# EAGLE board Qwiic_BMP388_Pressure_Sensor-Panel (EAGLE 9.5.2), part 1 of 3
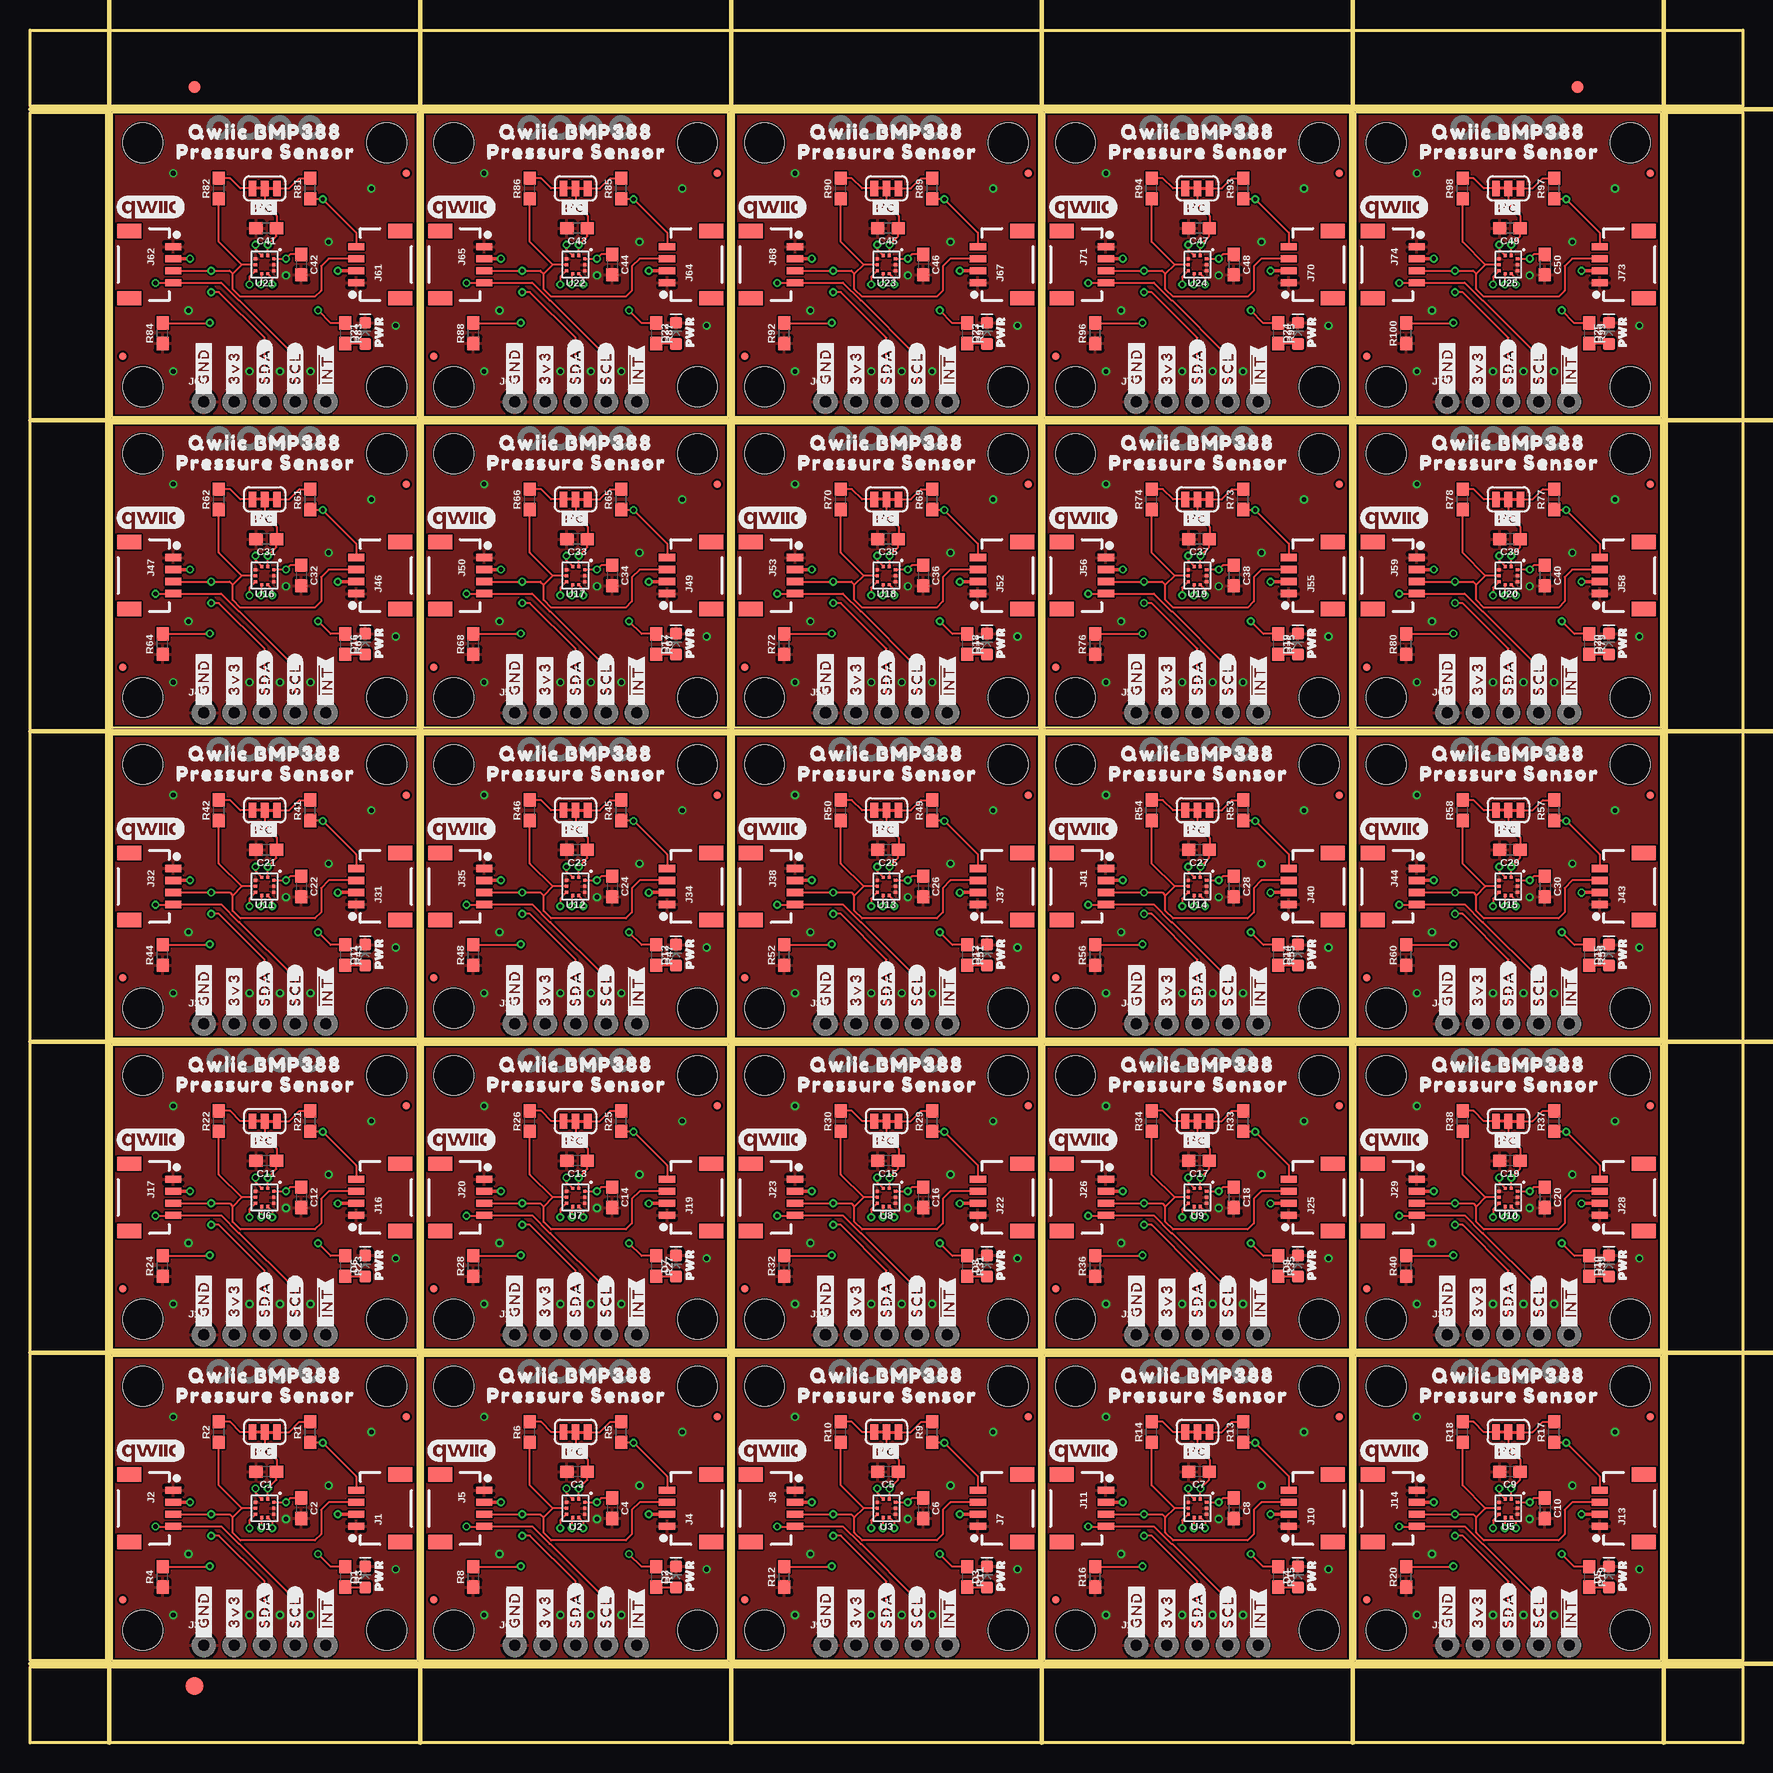
[diagram p0: board, top side]
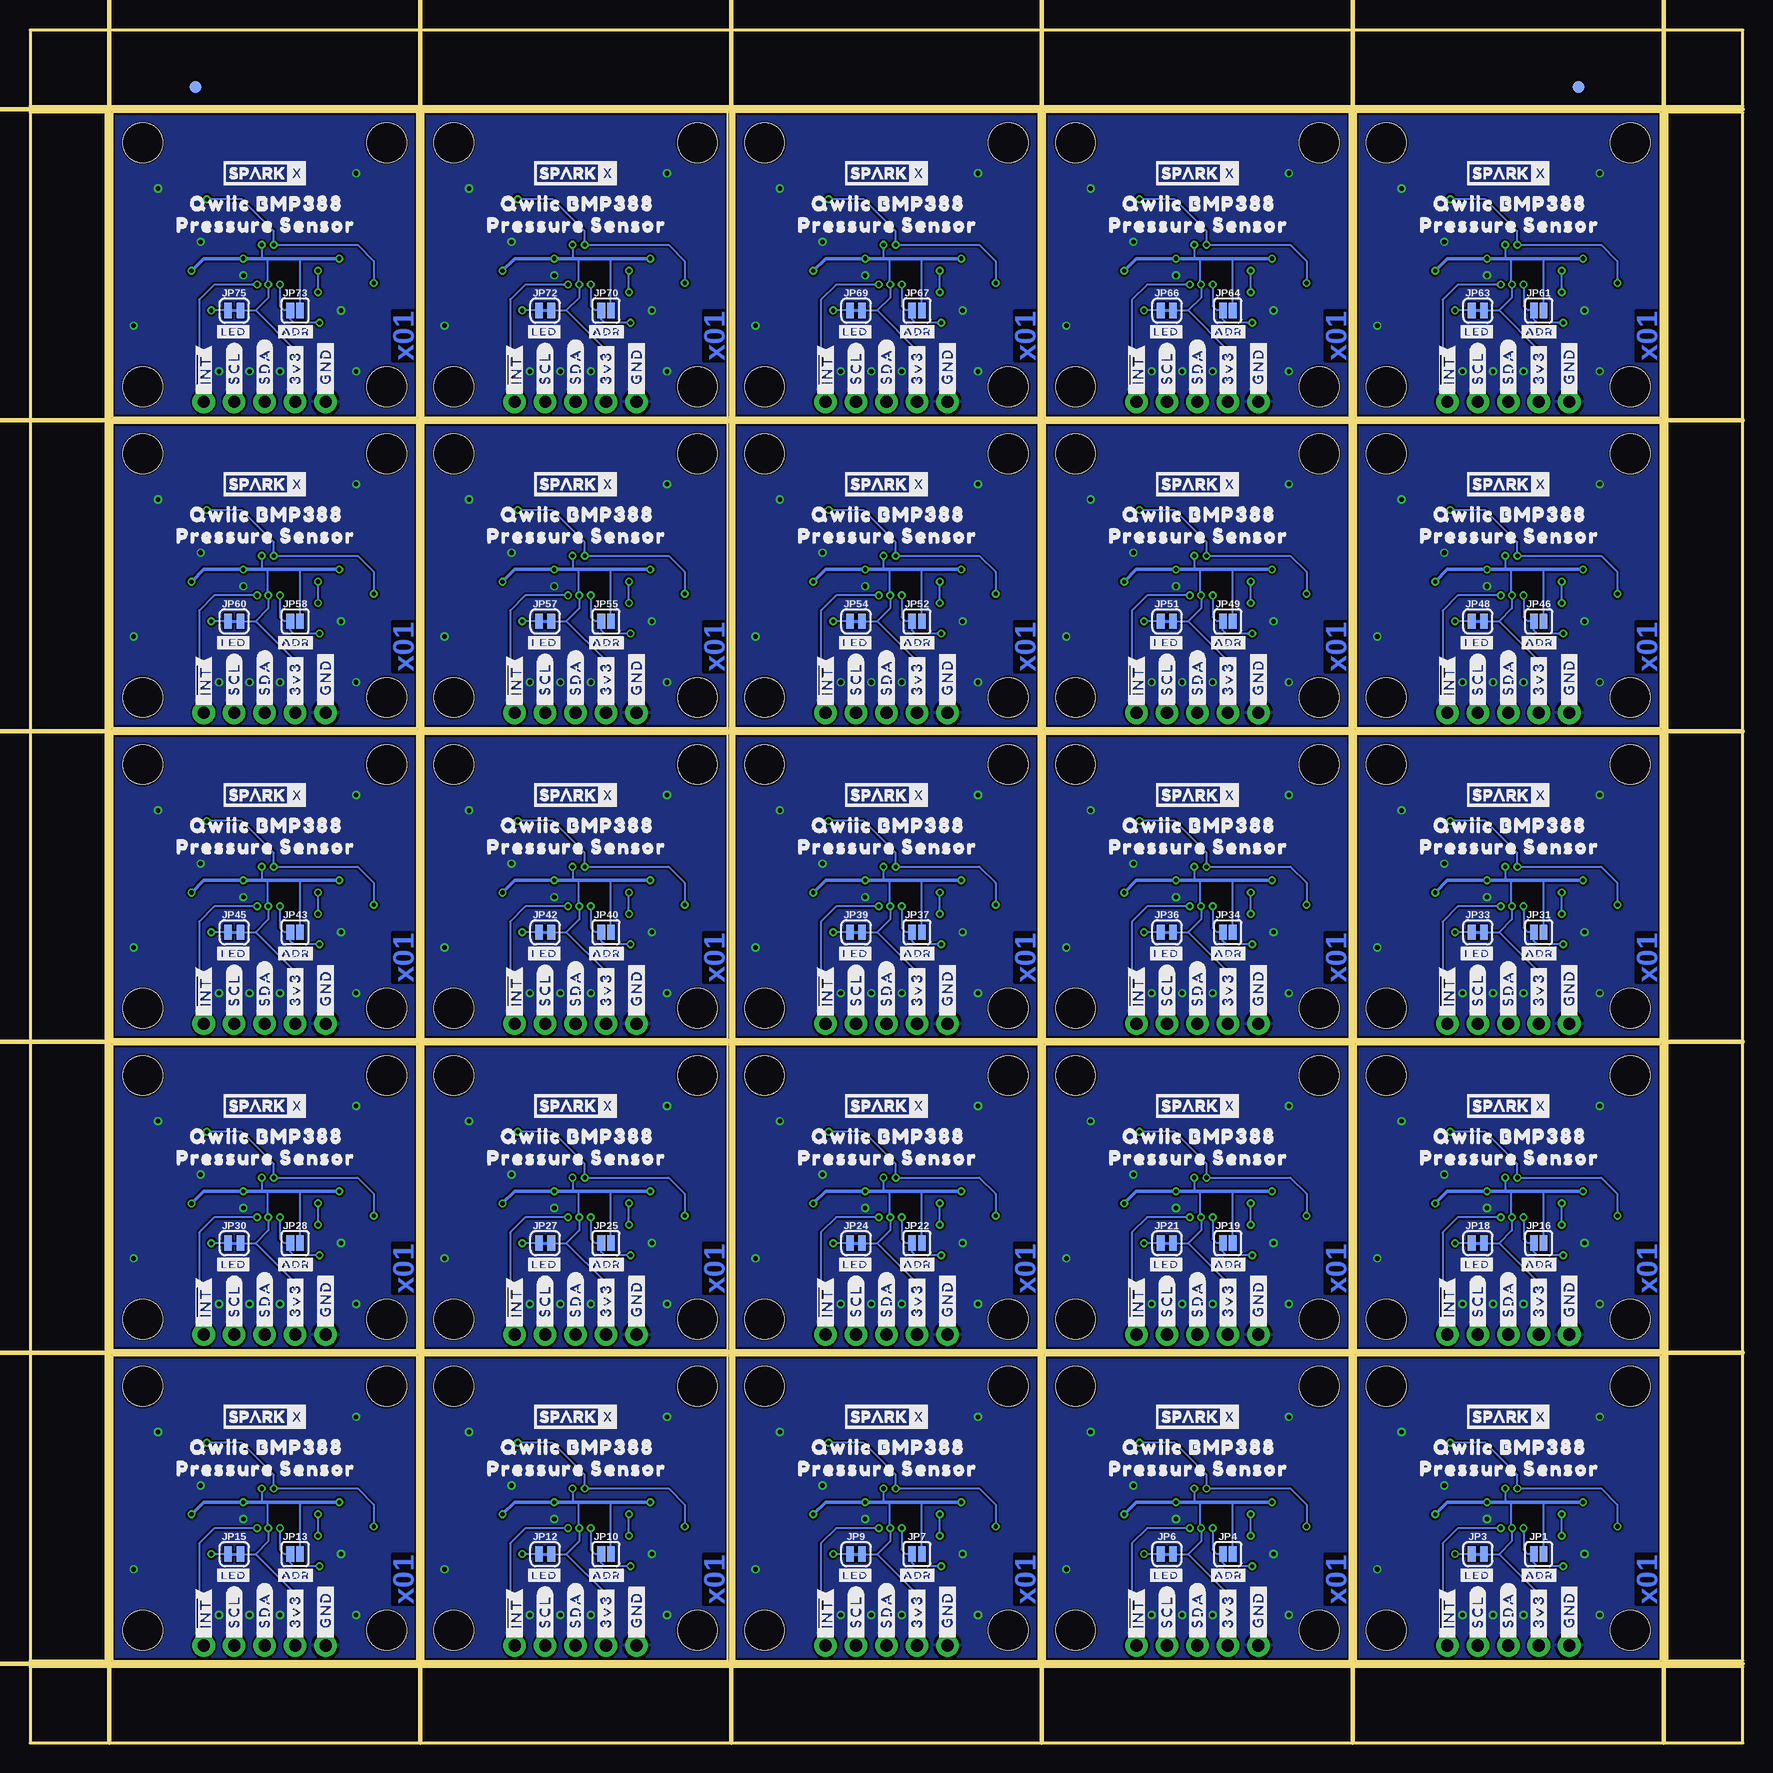
[diagram p1: board, bottom side, seen from below]

Size 142.75 x 142.75 mm. Coordinates in mm from the lower left corner, seen from the top.
Outline: 6.86,32.26 32.26,32.26 32.26,6.86 6.86,6.86 6.86,32.26
Outline: 32.77,32.26 58.17,32.26 58.17,6.86 32.77,6.86 32.77,32.26
Outline: 58.67,32.26 84.07,32.26 84.07,6.86 58.67,6.86 58.67,32.26
Outline: 84.58,32.26 109.98,32.26 109.98,6.86 84.58,6.86 84.58,32.26
Outline: 110.49,32.26 135.89,32.26 135.89,6.86 110.49,6.86 110.49,32.26
Outline: 6.86,58.17 32.26,58.17 32.26,32.77 6.86,32.77 6.86,58.17
Outline: 32.77,58.17 58.17,58.17 58.17,32.77 32.77,32.77 32.77,58.17
Outline: 58.67,58.17 84.07,58.17 84.07,32.77 58.67,32.77 58.67,58.17
Outline: 84.58,58.17 109.98,58.17 109.98,32.77 84.58,32.77 84.58,58.17
Outline: 110.49,58.17 135.89,58.17 135.89,32.77 110.49,32.77 110.49,58.17
Outline: 6.86,84.07 32.26,84.07 32.26,58.67 6.86,58.67 6.86,84.07
Outline: 32.77,84.07 58.17,84.07 58.17,58.67 32.77,58.67 32.77,84.07
Outline: 58.67,84.07 84.07,84.07 84.07,58.67 58.67,58.67 58.67,84.07
Outline: 84.58,84.07 109.98,84.07 109.98,58.67 84.58,58.67 84.58,84.07
Outline: 110.49,84.07 135.89,84.07 135.89,58.67 110.49,58.67 110.49,84.07
Outline: 6.86,109.98 32.26,109.98 32.26,84.58 6.86,84.58 6.86,109.98
Outline: 32.77,109.98 58.17,109.98 58.17,84.58 32.77,84.58 32.77,109.98
Outline: 58.67,109.98 84.07,109.98 84.07,84.58 58.67,84.58 58.67,109.98
Outline: 84.58,109.98 109.98,109.98 109.98,84.58 84.58,84.58 84.58,109.98
Outline: 110.49,109.98 135.89,109.98 135.89,84.58 110.49,84.58 110.49,109.98
Outline: 6.86,135.89 32.26,135.89 32.26,110.49 6.86,110.49 6.86,135.89
Outline: 32.77,135.89 58.17,135.89 58.17,110.49 32.77,110.49 32.77,135.89
Outline: 58.67,135.89 84.07,135.89 84.07,110.49 58.67,110.49 58.67,135.89
Outline: 84.58,135.89 109.98,135.89 109.98,110.49 84.58,110.49 84.58,135.89
Outline: 110.49,135.89 135.89,135.89 135.89,110.49 110.49,110.49 110.49,135.89
Outline: 0,6.35 142.75,6.35 142.75,0 0,0 0,6.35
Outline: 136.4,135.89 142.75,135.89 142.75,6.86 136.4,6.86 136.4,135.89
Outline: 0,142.75 142.75,142.75 142.75,136.4 0,136.4 0,142.75
Outline: 0,135.89 6.35,135.89 6.35,6.86 0,6.86 0,135.89
Copper layers (1*16): Top 0.035mm / dielectric 1.5mm / Bottom 0.035mm
Design rules "Qwiic_BMP388_Pressure_Sensor": minimum track width 6mil, minimum drill 0.3mm, track to track 6mil, track to pad 6mil, pad to pad 6mil, via to via 6mil, smd to smd 6mil, copper to edge 6mil, drill to drill 6mil, minimum pad ring 6mil, minimum via ring 6mil, stop-mask expansion 4mil, vias tented up to drill 25mil, thermal gap 10mil
Milling: 12 lines

## Footprints (pad centres in the part's own frame; a part is rotated, then mirrored left to right if it is on the bottom)
QWIIC_BOARD_MOUNT_HOLES = hole 3.302: -10.16,10.16; 10.16,10.16; 10.16,-10.16; -10.16,-10.16
0603 = smd 1.1 x 1: 1 -0.85,0; 2 0.85,0
LED-0603 = smd 1 x 1: A -0.877,0; C 0.877,0
FIDUCIAL-1X2 = smd 1 x 1: 1 0,0
FIDUCIAL-1.5X3 = smd 1.5 x 1.5: 1 0,0
FIDUCIAL-MICRO = smd 0.635 x 0.635: 1 0,0
1X04_1MM_RA = smd 0.6 x 1.35: 1 -1.5,0; 2 -0.5,0; 3 0.5,0; 4 1.5,0 | smd 1.2 x 2: NC1 2.8,-3.675; NC2 -2.8,-3.675
1X05_NO_SILK = drill 1.016 pad 1.88: 1 0,0; 2 2.54,0; 3 5.08,0; 4 7.62,0; 5 10.16,0
SMT-JUMPER_2_NO_SILK = smd 0.635 x 1.27: 1 -0.406,0; 2 0.406,0
SMT-JUMPER_3_2-NC_TRACE_SILK = smd 0.635 x 1.27: 1 -1.016,0; 2 0,0; 3 1.016,0
SMT-JUMPER_2_NC_TRACE_SILK = smd 0.635 x 1.27: 1 -0.508,0; 2 0.508,0
LGA-10(2X2) = smd 0.25 x 0.275: 1 0.25,0.762; 2 -0.25,0.762; 6 -0.25,-0.762; 7 0.25,-0.762 | smd 0.275 x 0.25: 3 -0.762,0.5; 4 -0.762,0; 5 -0.762,-0.5; 8 0.762,-0.5; 9 0.762,0; 10 0.762,0.5

## Placement (x,y rotation side)
A1  QWIIC_BOARD_OUTLINEH  [QWIIC_BOARD_MOUNT_HOLES]  19.56,19.56 180 top
A2  QWIIC_BOARD_OUTLINEH  [QWIIC_BOARD_MOUNT_HOLES]  45.47,19.56 180 top
A3  QWIIC_BOARD_OUTLINEH  [QWIIC_BOARD_MOUNT_HOLES]  71.37,19.56 180 top
A4  QWIIC_BOARD_OUTLINEH  [QWIIC_BOARD_MOUNT_HOLES]  97.28,19.56 180 top
A5  QWIIC_BOARD_OUTLINEH  [QWIIC_BOARD_MOUNT_HOLES]  123.19,19.56 180 top
A6  QWIIC_BOARD_OUTLINEH  [QWIIC_BOARD_MOUNT_HOLES]  19.56,45.47 180 top
A7  QWIIC_BOARD_OUTLINEH  [QWIIC_BOARD_MOUNT_HOLES]  45.47,45.47 180 top
A8  QWIIC_BOARD_OUTLINEH  [QWIIC_BOARD_MOUNT_HOLES]  71.37,45.47 180 top
A9  QWIIC_BOARD_OUTLINEH  [QWIIC_BOARD_MOUNT_HOLES]  97.28,45.47 180 top
A10  QWIIC_BOARD_OUTLINEH  [QWIIC_BOARD_MOUNT_HOLES]  123.19,45.47 180 top
A11  QWIIC_BOARD_OUTLINEH  [QWIIC_BOARD_MOUNT_HOLES]  19.56,71.37 180 top
A12  QWIIC_BOARD_OUTLINEH  [QWIIC_BOARD_MOUNT_HOLES]  45.47,71.37 180 top
A13  QWIIC_BOARD_OUTLINEH  [QWIIC_BOARD_MOUNT_HOLES]  71.37,71.37 180 top
A14  QWIIC_BOARD_OUTLINEH  [QWIIC_BOARD_MOUNT_HOLES]  97.28,71.37 180 top
A15  QWIIC_BOARD_OUTLINEH  [QWIIC_BOARD_MOUNT_HOLES]  123.19,71.37 180 top
A16  QWIIC_BOARD_OUTLINEH  [QWIIC_BOARD_MOUNT_HOLES]  19.56,97.28 180 top
A17  QWIIC_BOARD_OUTLINEH  [QWIIC_BOARD_MOUNT_HOLES]  45.47,97.28 180 top
A18  QWIIC_BOARD_OUTLINEH  [QWIIC_BOARD_MOUNT_HOLES]  71.37,97.28 180 top
A19  QWIIC_BOARD_OUTLINEH  [QWIIC_BOARD_MOUNT_HOLES]  97.28,97.28 180 top
A20  QWIIC_BOARD_OUTLINEH  [QWIIC_BOARD_MOUNT_HOLES]  123.19,97.28 180 top
A21  QWIIC_BOARD_OUTLINEH  [QWIIC_BOARD_MOUNT_HOLES]  19.56,123.19 180 top
A22  QWIIC_BOARD_OUTLINEH  [QWIIC_BOARD_MOUNT_HOLES]  45.47,123.19 180 top
A23  QWIIC_BOARD_OUTLINEH  [QWIIC_BOARD_MOUNT_HOLES]  71.37,123.19 180 top
A24  QWIIC_BOARD_OUTLINEH  [QWIIC_BOARD_MOUNT_HOLES]  97.28,123.19 180 top
A25  QWIIC_BOARD_OUTLINEH  [QWIIC_BOARD_MOUNT_HOLES]  123.19,123.19 180 top
C1  0.1uF  [0603]  19.68,22.61 180 top
C2  0.1uF  [0603]  22.61,19.56 270 top
C3  0.1uF  [0603]  45.59,22.61 180 top
C4  0.1uF  [0603]  48.51,19.56 270 top
C5  0.1uF  [0603]  71.5,22.61 180 top
C6  0.1uF  [0603]  74.42,19.56 270 top
C7  0.1uF  [0603]  97.41,22.61 180 top
C8  0.1uF  [0603]  100.33,19.56 270 top
C9  0.1uF  [0603]  123.32,22.61 180 top
C10  0.1uF  [0603]  126.24,19.56 270 top
C11  0.1uF  [0603]  19.68,48.51 180 top
C12  0.1uF  [0603]  22.61,45.47 270 top
C13  0.1uF  [0603]  45.59,48.51 180 top
C14  0.1uF  [0603]  48.51,45.47 270 top
C15  0.1uF  [0603]  71.5,48.51 180 top
C16  0.1uF  [0603]  74.42,45.47 270 top
C17  0.1uF  [0603]  97.41,48.51 180 top
C18  0.1uF  [0603]  100.33,45.47 270 top
C19  0.1uF  [0603]  123.32,48.51 180 top
C20  0.1uF  [0603]  126.24,45.47 270 top
C21  0.1uF  [0603]  19.68,74.42 180 top
C22  0.1uF  [0603]  22.61,71.37 270 top
C23  0.1uF  [0603]  45.59,74.42 180 top
C24  0.1uF  [0603]  48.51,71.37 270 top
C25  0.1uF  [0603]  71.5,74.42 180 top
C26  0.1uF  [0603]  74.42,71.37 270 top
C27  0.1uF  [0603]  97.41,74.42 180 top
C28  0.1uF  [0603]  100.33,71.37 270 top
C29  0.1uF  [0603]  123.32,74.42 180 top
C30  0.1uF  [0603]  126.24,71.37 270 top
C31  0.1uF  [0603]  19.68,100.33 180 top
C32  0.1uF  [0603]  22.61,97.28 270 top
C33  0.1uF  [0603]  45.59,100.33 180 top
C34  0.1uF  [0603]  48.51,97.28 270 top
C35  0.1uF  [0603]  71.5,100.33 180 top
C36  0.1uF  [0603]  74.42,97.28 270 top
C37  0.1uF  [0603]  97.41,100.33 180 top
C38  0.1uF  [0603]  100.33,97.28 270 top
C39  0.1uF  [0603]  123.32,100.33 180 top
C40  0.1uF  [0603]  126.24,97.28 270 top
C41  0.1uF  [0603]  19.68,126.24 180 top
C42  0.1uF  [0603]  22.61,123.19 270 top
C43  0.1uF  [0603]  45.59,126.24 180 top
C44  0.1uF  [0603]  48.51,123.19 270 top
C45  0.1uF  [0603]  71.5,126.24 180 top
C46  0.1uF  [0603]  74.42,123.19 270 top
C47  0.1uF  [0603]  97.41,126.24 180 top
C48  0.1uF  [0603]  100.33,123.19 270 top
C49  0.1uF  [0603]  123.32,126.24 180 top
C50  0.1uF  [0603]  126.24,123.19 270 top
D1  RED  [LED-0603]  27.94,13.84 90 top
D2  RED  [LED-0603]  53.85,13.84 90 top
D3  RED  [LED-0603]  79.76,13.84 90 top
D4  RED  [LED-0603]  105.66,13.84 90 top
D5  RED  [LED-0603]  131.57,13.84 90 top
D6  RED  [LED-0603]  27.94,39.75 90 top
D7  RED  [LED-0603]  53.85,39.75 90 top
D8  RED  [LED-0603]  79.76,39.75 90 top
D9  RED  [LED-0603]  105.66,39.75 90 top
D10  RED  [LED-0603]  131.57,39.75 90 top
D11  RED  [LED-0603]  27.94,65.66 90 top
D12  RED  [LED-0603]  53.85,65.66 90 top
D13  RED  [LED-0603]  79.76,65.66 90 top
D14  RED  [LED-0603]  105.66,65.66 90 top
D15  RED  [LED-0603]  131.57,65.66 90 top
D16  RED  [LED-0603]  27.94,91.57 90 top
D17  RED  [LED-0603]  53.85,91.57 90 top
D18  RED  [LED-0603]  79.76,91.57 90 top
D19  RED  [LED-0603]  105.66,91.57 90 top
D20  RED  [LED-0603]  131.57,91.57 90 top
D21  RED  [LED-0603]  27.94,117.48 90 top
D22  RED  [LED-0603]  53.85,117.48 90 top
D23  RED  [LED-0603]  79.76,117.48 90 top
D24  RED  [LED-0603]  105.66,117.48 90 top
D25  RED  [LED-0603]  131.57,117.48 90 top
E$1  [FIDUCIAL-1X2]  13.72,137.99 0 top
E$2  [FIDUCIAL-1X2]  13.72,137.99 0 bottom
E$3  [FIDUCIAL-1X2]  128.97,137.99 0 top
E$4  [FIDUCIAL-1X2]  128.97,137.99 0 bottom
E$5  [FIDUCIAL-1.5X3]  13.72,4.76 0 top
FD1  FIDUCIALUFIDUCIAL  [FIDUCIAL-MICRO]  31.37,27.18 0 top
FD2  FIDUCIALUFIDUCIAL  [FIDUCIAL-MICRO]  7.75,11.94 0 top
FD3  FIDUCIALUFIDUCIAL  [FIDUCIAL-MICRO]  57.28,27.18 0 top
FD4  FIDUCIALUFIDUCIAL  [FIDUCIAL-MICRO]  33.66,11.94 0 top
FD5  FIDUCIALUFIDUCIAL  [FIDUCIAL-MICRO]  83.19,27.18 0 top
FD6  FIDUCIALUFIDUCIAL  [FIDUCIAL-MICRO]  59.56,11.94 0 top
FD7  FIDUCIALUFIDUCIAL  [FIDUCIAL-MICRO]  109.09,27.18 0 top
FD8  FIDUCIALUFIDUCIAL  [FIDUCIAL-MICRO]  85.47,11.94 0 top
FD9  FIDUCIALUFIDUCIAL  [FIDUCIAL-MICRO]  135,27.18 0 top
FD10  FIDUCIALUFIDUCIAL  [FIDUCIAL-MICRO]  111.38,11.94 0 top
FD11  FIDUCIALUFIDUCIAL  [FIDUCIAL-MICRO]  31.37,53.09 0 top
FD12  FIDUCIALUFIDUCIAL  [FIDUCIAL-MICRO]  7.75,37.85 0 top
FD13  FIDUCIALUFIDUCIAL  [FIDUCIAL-MICRO]  57.28,53.09 0 top
FD14  FIDUCIALUFIDUCIAL  [FIDUCIAL-MICRO]  33.66,37.85 0 top
FD15  FIDUCIALUFIDUCIAL  [FIDUCIAL-MICRO]  83.19,53.09 0 top
FD16  FIDUCIALUFIDUCIAL  [FIDUCIAL-MICRO]  59.56,37.85 0 top
FD17  FIDUCIALUFIDUCIAL  [FIDUCIAL-MICRO]  109.09,53.09 0 top
FD18  FIDUCIALUFIDUCIAL  [FIDUCIAL-MICRO]  85.47,37.85 0 top
FD19  FIDUCIALUFIDUCIAL  [FIDUCIAL-MICRO]  135,53.09 0 top
FD20  FIDUCIALUFIDUCIAL  [FIDUCIAL-MICRO]  111.38,37.85 0 top
FD21  FIDUCIALUFIDUCIAL  [FIDUCIAL-MICRO]  31.37,78.99 0 top
FD22  FIDUCIALUFIDUCIAL  [FIDUCIAL-MICRO]  7.75,63.75 0 top
FD23  FIDUCIALUFIDUCIAL  [FIDUCIAL-MICRO]  57.28,78.99 0 top
FD24  FIDUCIALUFIDUCIAL  [FIDUCIAL-MICRO]  33.66,63.75 0 top
FD25  FIDUCIALUFIDUCIAL  [FIDUCIAL-MICRO]  83.19,78.99 0 top
FD26  FIDUCIALUFIDUCIAL  [FIDUCIAL-MICRO]  59.56,63.75 0 top
FD27  FIDUCIALUFIDUCIAL  [FIDUCIAL-MICRO]  109.09,78.99 0 top
FD28  FIDUCIALUFIDUCIAL  [FIDUCIAL-MICRO]  85.47,63.75 0 top
FD29  FIDUCIALUFIDUCIAL  [FIDUCIAL-MICRO]  135,78.99 0 top
FD30  FIDUCIALUFIDUCIAL  [FIDUCIAL-MICRO]  111.38,63.75 0 top
FD31  FIDUCIALUFIDUCIAL  [FIDUCIAL-MICRO]  31.37,104.9 0 top
FD32  FIDUCIALUFIDUCIAL  [FIDUCIAL-MICRO]  7.75,89.66 0 top
FD33  FIDUCIALUFIDUCIAL  [FIDUCIAL-MICRO]  57.28,104.9 0 top
FD34  FIDUCIALUFIDUCIAL  [FIDUCIAL-MICRO]  33.66,89.66 0 top
FD35  FIDUCIALUFIDUCIAL  [FIDUCIAL-MICRO]  83.19,104.9 0 top
FD36  FIDUCIALUFIDUCIAL  [FIDUCIAL-MICRO]  59.56,89.66 0 top
FD37  FIDUCIALUFIDUCIAL  [FIDUCIAL-MICRO]  109.09,104.9 0 top
FD38  FIDUCIALUFIDUCIAL  [FIDUCIAL-MICRO]  85.47,89.66 0 top
FD39  FIDUCIALUFIDUCIAL  [FIDUCIAL-MICRO]  135,104.9 0 top
FD40  FIDUCIALUFIDUCIAL  [FIDUCIAL-MICRO]  111.38,89.66 0 top
FD41  FIDUCIALUFIDUCIAL  [FIDUCIAL-MICRO]  31.37,130.81 0 top
FD42  FIDUCIALUFIDUCIAL  [FIDUCIAL-MICRO]  7.75,115.57 0 top
FD43  FIDUCIALUFIDUCIAL  [FIDUCIAL-MICRO]  57.28,130.81 0 top
FD44  FIDUCIALUFIDUCIAL  [FIDUCIAL-MICRO]  33.66,115.57 0 top
FD45  FIDUCIALUFIDUCIAL  [FIDUCIAL-MICRO]  83.19,130.81 0 top
FD46  FIDUCIALUFIDUCIAL  [FIDUCIAL-MICRO]  59.56,115.57 0 top
FD47  FIDUCIALUFIDUCIAL  [FIDUCIAL-MICRO]  109.09,130.81 0 top
FD48  FIDUCIALUFIDUCIAL  [FIDUCIAL-MICRO]  85.47,115.57 0 top
FD49  FIDUCIALUFIDUCIAL  [FIDUCIAL-MICRO]  135,130.81 0 top
FD50  FIDUCIALUFIDUCIAL  [FIDUCIAL-MICRO]  111.38,115.57 0 top
FRAME1  FRAME-LETTERNO_PACKAGE  [DUMMY]  6.86,6.86 0 top
FRAME2  FRAME-LETTERNO_PACKAGE  [DUMMY]  32.77,6.86 0 top
FRAME3  FRAME-LETTERNO_PACKAGE  [DUMMY]  58.67,6.86 0 top
FRAME4  FRAME-LETTERNO_PACKAGE  [DUMMY]  84.58,6.86 0 top
FRAME5  FRAME-LETTERNO_PACKAGE  [DUMMY]  110.49,6.86 0 top
FRAME6  FRAME-LETTERNO_PACKAGE  [DUMMY]  6.86,32.77 0 top
FRAME7  FRAME-LETTERNO_PACKAGE  [DUMMY]  32.77,32.77 0 top
FRAME8  FRAME-LETTERNO_PACKAGE  [DUMMY]  58.67,32.77 0 top
FRAME9  FRAME-LETTERNO_PACKAGE  [DUMMY]  84.58,32.77 0 top
FRAME10  FRAME-LETTERNO_PACKAGE  [DUMMY]  110.49,32.77 0 top
FRAME11  FRAME-LETTERNO_PACKAGE  [DUMMY]  6.86,58.67 0 top
FRAME12  FRAME-LETTERNO_PACKAGE  [DUMMY]  32.77,58.67 0 top
FRAME13  FRAME-LETTERNO_PACKAGE  [DUMMY]  58.67,58.67 0 top
FRAME14  FRAME-LETTERNO_PACKAGE  [DUMMY]  84.58,58.67 0 top
FRAME15  FRAME-LETTERNO_PACKAGE  [DUMMY]  110.49,58.67 0 top
FRAME16  FRAME-LETTERNO_PACKAGE  [DUMMY]  6.86,84.58 0 top
FRAME17  FRAME-LETTERNO_PACKAGE  [DUMMY]  32.77,84.58 0 top
FRAME18  FRAME-LETTERNO_PACKAGE  [DUMMY]  58.67,84.58 0 top
FRAME19  FRAME-LETTERNO_PACKAGE  [DUMMY]  84.58,84.58 0 top
FRAME20  FRAME-LETTERNO_PACKAGE  [DUMMY]  110.49,84.58 0 top
FRAME21  FRAME-LETTERNO_PACKAGE  [DUMMY]  6.86,110.49 0 top
FRAME22  FRAME-LETTERNO_PACKAGE  [DUMMY]  32.77,110.49 0 top
FRAME23  FRAME-LETTERNO_PACKAGE  [DUMMY]  58.67,110.49 0 top
FRAME24  FRAME-LETTERNO_PACKAGE  [DUMMY]  84.58,110.49 0 top
FRAME25  FRAME-LETTERNO_PACKAGE  [DUMMY]  110.49,110.49 0 top
J1  [1X04_1MM_RA]  27.18,19.56 90 top
J2  [1X04_1MM_RA]  11.94,19.56 270 top
J3  [1X05_NO_SILK]  14.48,8.13 0 top
J4  [1X04_1MM_RA]  53.09,19.56 90 top
J5  [1X04_1MM_RA]  37.85,19.56 270 top
J6  [1X05_NO_SILK]  40.39,8.13 0 top
J7  [1X04_1MM_RA]  78.99,19.56 90 top
J8  [1X04_1MM_RA]  63.75,19.56 270 top
J9  [1X05_NO_SILK]  66.29,8.13 0 top
J10  [1X04_1MM_RA]  104.9,19.56 90 top
J11  [1X04_1MM_RA]  89.66,19.56 270 top
J12  [1X05_NO_SILK]  92.2,8.13 0 top
J13  [1X04_1MM_RA]  130.81,19.56 90 top
J14  [1X04_1MM_RA]  115.57,19.56 270 top
J15  [1X05_NO_SILK]  118.11,8.13 0 top
J16  [1X04_1MM_RA]  27.18,45.47 90 top
J17  [1X04_1MM_RA]  11.94,45.47 270 top
J18  [1X05_NO_SILK]  14.48,34.04 0 top
J19  [1X04_1MM_RA]  53.09,45.47 90 top
J20  [1X04_1MM_RA]  37.85,45.47 270 top
J21  [1X05_NO_SILK]  40.39,34.04 0 top
J22  [1X04_1MM_RA]  78.99,45.47 90 top
J23  [1X04_1MM_RA]  63.75,45.47 270 top
J24  [1X05_NO_SILK]  66.29,34.04 0 top
J25  [1X04_1MM_RA]  104.9,45.47 90 top
J26  [1X04_1MM_RA]  89.66,45.47 270 top
J27  [1X05_NO_SILK]  92.2,34.04 0 top
J28  [1X04_1MM_RA]  130.81,45.47 90 top
J29  [1X04_1MM_RA]  115.57,45.47 270 top
J30  [1X05_NO_SILK]  118.11,34.04 0 top
J31  [1X04_1MM_RA]  27.18,71.37 90 top
J32  [1X04_1MM_RA]  11.94,71.37 270 top
J33  [1X05_NO_SILK]  14.48,59.94 0 top
J34  [1X04_1MM_RA]  53.09,71.37 90 top
J35  [1X04_1MM_RA]  37.85,71.37 270 top
J36  [1X05_NO_SILK]  40.39,59.94 0 top
J37  [1X04_1MM_RA]  78.99,71.37 90 top
J38  [1X04_1MM_RA]  63.75,71.37 270 top
J39  [1X05_NO_SILK]  66.29,59.94 0 top
J40  [1X04_1MM_RA]  104.9,71.37 90 top
J41  [1X04_1MM_RA]  89.66,71.37 270 top
J42  [1X05_NO_SILK]  92.2,59.94 0 top
J43  [1X04_1MM_RA]  130.81,71.37 90 top
J44  [1X04_1MM_RA]  115.57,71.37 270 top
J45  [1X05_NO_SILK]  118.11,59.94 0 top
J46  [1X04_1MM_RA]  27.18,97.28 90 top
J47  [1X04_1MM_RA]  11.94,97.28 270 top
J48  [1X05_NO_SILK]  14.48,85.85 0 top
J49  [1X04_1MM_RA]  53.09,97.28 90 top
J50  [1X04_1MM_RA]  37.85,97.28 270 top
J51  [1X05_NO_SILK]  40.39,85.85 0 top
J52  [1X04_1MM_RA]  78.99,97.28 90 top
J53  [1X04_1MM_RA]  63.75,97.28 270 top
J54  [1X05_NO_SILK]  66.29,85.85 0 top
J55  [1X04_1MM_RA]  104.9,97.28 90 top
J56  [1X04_1MM_RA]  89.66,97.28 270 top
J57  [1X05_NO_SILK]  92.2,85.85 0 top
J58  [1X04_1MM_RA]  130.81,97.28 90 top
J59  [1X04_1MM_RA]  115.57,97.28 270 top
J60  [1X05_NO_SILK]  118.11,85.85 0 top
J61  [1X04_1MM_RA]  27.18,123.19 90 top
J62  [1X04_1MM_RA]  11.94,123.19 270 top
J63  [1X05_NO_SILK]  14.48,111.76 0 top
J64  [1X04_1MM_RA]  53.09,123.19 90 top
J65  [1X04_1MM_RA]  37.85,123.19 270 top
J66  [1X05_NO_SILK]  40.39,111.76 0 top
J67  [1X04_1MM_RA]  78.99,123.19 90 top
J68  [1X04_1MM_RA]  63.75,123.19 270 top
J69  [1X05_NO_SILK]  66.29,111.76 0 top
J70  [1X04_1MM_RA]  104.9,123.19 90 top
J71  [1X04_1MM_RA]  89.66,123.19 270 top
J72  [1X05_NO_SILK]  92.2,111.76 0 top
J73  [1X04_1MM_RA]  130.81,123.19 90 top
J74  [1X04_1MM_RA]  115.57,123.19 270 top
J75  [1X05_NO_SILK]  118.11,111.76 0 top
JP1  [SMT-JUMPER_2_NO_SILK]  17.02,15.75 0 bottom
JP2  [SMT-JUMPER_3_2-NC_TRACE_SILK]  19.56,25.91 180 top
JP3  [SMT-JUMPER_2_NC_TRACE_SILK]  22.1,15.75 0 bottom
JP4  [SMT-JUMPER_2_NO_SILK]  42.93,15.75 0 bottom
JP5  [SMT-JUMPER_3_2-NC_TRACE_SILK]  45.47,25.91 180 top
JP6  [SMT-JUMPER_2_NC_TRACE_SILK]  48.01,15.75 0 bottom
JP7  [SMT-JUMPER_2_NO_SILK]  68.83,15.75 0 bottom
JP8  [SMT-JUMPER_3_2-NC_TRACE_SILK]  71.37,25.91 180 top
JP9  [SMT-JUMPER_2_NC_TRACE_SILK]  73.91,15.75 0 bottom
JP10  [SMT-JUMPER_2_NO_SILK]  94.74,15.75 0 bottom
JP11  [SMT-JUMPER_3_2-NC_TRACE_SILK]  97.28,25.91 180 top
JP12  [SMT-JUMPER_2_NC_TRACE_SILK]  99.82,15.75 0 bottom
JP13  [SMT-JUMPER_2_NO_SILK]  120.65,15.75 0 bottom
JP14  [SMT-JUMPER_3_2-NC_TRACE_SILK]  123.19,25.91 180 top
JP15  [SMT-JUMPER_2_NC_TRACE_SILK]  125.73,15.75 0 bottom
JP16  [SMT-JUMPER_2_NO_SILK]  17.02,41.66 0 bottom
JP17  [SMT-JUMPER_3_2-NC_TRACE_SILK]  19.56,51.82 180 top
JP18  [SMT-JUMPER_2_NC_TRACE_SILK]  22.1,41.66 0 bottom
JP19  [SMT-JUMPER_2_NO_SILK]  42.93,41.66 0 bottom
JP20  [SMT-JUMPER_3_2-NC_TRACE_SILK]  45.47,51.82 180 top
JP21  [SMT-JUMPER_2_NC_TRACE_SILK]  48.01,41.66 0 bottom
JP22  [SMT-JUMPER_2_NO_SILK]  68.83,41.66 0 bottom
JP23  [SMT-JUMPER_3_2-NC_TRACE_SILK]  71.37,51.82 180 top
JP24  [SMT-JUMPER_2_NC_TRACE_SILK]  73.91,41.66 0 bottom
JP25  [SMT-JUMPER_2_NO_SILK]  94.74,41.66 0 bottom
JP26  [SMT-JUMPER_3_2-NC_TRACE_SILK]  97.28,51.82 180 top
JP27  [SMT-JUMPER_2_NC_TRACE_SILK]  99.82,41.66 0 bottom
JP28  [SMT-JUMPER_2_NO_SILK]  120.65,41.66 0 bottom
JP29  [SMT-JUMPER_3_2-NC_TRACE_SILK]  123.19,51.82 180 top
JP30  [SMT-JUMPER_2_NC_TRACE_SILK]  125.73,41.66 0 bottom
JP31  [SMT-JUMPER_2_NO_SILK]  17.02,67.56 0 bottom
JP32  [SMT-JUMPER_3_2-NC_TRACE_SILK]  19.56,77.72 180 top
JP33  [SMT-JUMPER_2_NC_TRACE_SILK]  22.1,67.56 0 bottom
JP34  [SMT-JUMPER_2_NO_SILK]  42.93,67.56 0 bottom
JP35  [SMT-JUMPER_3_2-NC_TRACE_SILK]  45.47,77.72 180 top
JP36  [SMT-JUMPER_2_NC_TRACE_SILK]  48.01,67.56 0 bottom
JP37  [SMT-JUMPER_2_NO_SILK]  68.83,67.56 0 bottom
JP38  [SMT-JUMPER_3_2-NC_TRACE_SILK]  71.37,77.72 180 top
JP39  [SMT-JUMPER_2_NC_TRACE_SILK]  73.91,67.56 0 bottom
JP40  [SMT-JUMPER_2_NO_SILK]  94.74,67.56 0 bottom
JP41  [SMT-JUMPER_3_2-NC_TRACE_SILK]  97.28,77.72 180 top
JP42  [SMT-JUMPER_2_NC_TRACE_SILK]  99.82,67.56 0 bottom
JP43  [SMT-JUMPER_2_NO_SILK]  120.65,67.56 0 bottom
JP44  [SMT-JUMPER_3_2-NC_TRACE_SILK]  123.19,77.72 180 top
JP45  [SMT-JUMPER_2_NC_TRACE_SILK]  125.73,67.56 0 bottom
JP46  [SMT-JUMPER_2_NO_SILK]  17.02,93.47 0 bottom
JP47  [SMT-JUMPER_3_2-NC_TRACE_SILK]  19.56,103.63 180 top
JP48  [SMT-JUMPER_2_NC_TRACE_SILK]  22.1,93.47 0 bottom
JP49  [SMT-JUMPER_2_NO_SILK]  42.93,93.47 0 bottom
JP50  [SMT-JUMPER_3_2-NC_TRACE_SILK]  45.47,103.63 180 top
JP51  [SMT-JUMPER_2_NC_TRACE_SILK]  48.01,93.47 0 bottom
JP52  [SMT-JUMPER_2_NO_SILK]  68.83,93.47 0 bottom
JP53  [SMT-JUMPER_3_2-NC_TRACE_SILK]  71.37,103.63 180 top
JP54  [SMT-JUMPER_2_NC_TRACE_SILK]  73.91,93.47 0 bottom
JP55  [SMT-JUMPER_2_NO_SILK]  94.74,93.47 0 bottom
JP56  [SMT-JUMPER_3_2-NC_TRACE_SILK]  97.28,103.63 180 top
JP57  [SMT-JUMPER_2_NC_TRACE_SILK]  99.82,93.47 0 bottom
JP58  [SMT-JUMPER_2_NO_SILK]  120.65,93.47 0 bottom
JP59  [SMT-JUMPER_3_2-NC_TRACE_SILK]  123.19,103.63 180 top
JP60  [SMT-JUMPER_2_NC_TRACE_SILK]  125.73,93.47 0 bottom
JP61  [SMT-JUMPER_2_NO_SILK]  17.02,119.38 0 bottom
JP62  [SMT-JUMPER_3_2-NC_TRACE_SILK]  19.56,129.54 180 top
JP63  [SMT-JUMPER_2_NC_TRACE_SILK]  22.1,119.38 0 bottom
JP64  [SMT-JUMPER_2_NO_SILK]  42.93,119.38 0 bottom
JP65  [SMT-JUMPER_3_2-NC_TRACE_SILK]  45.47,129.54 180 top
JP66  [SMT-JUMPER_2_NC_TRACE_SILK]  48.01,119.38 0 bottom
JP67  [SMT-JUMPER_2_NO_SILK]  68.83,119.38 0 bottom
JP68  [SMT-JUMPER_3_2-NC_TRACE_SILK]  71.37,129.54 180 top
JP69  [SMT-JUMPER_2_NC_TRACE_SILK]  73.91,119.38 0 bottom
JP70  [SMT-JUMPER_2_NO_SILK]  94.74,119.38 0 bottom
JP71  [SMT-JUMPER_3_2-NC_TRACE_SILK]  97.28,129.54 180 top
JP72  [SMT-JUMPER_2_NC_TRACE_SILK]  99.82,119.38 0 bottom
JP73  [SMT-JUMPER_2_NO_SILK]  120.65,119.38 0 bottom
JP74  [SMT-JUMPER_3_2-NC_TRACE_SILK]  123.19,129.54 180 top
JP75  [SMT-JUMPER_2_NC_TRACE_SILK]  125.73,119.38 0 bottom
R1  2.2k  [0603]  23.37,25.91 90 top
R2  2.2k  [0603]  15.75,25.91 90 top
R3  1k  [0603]  26.29,13.84 270 top
R4  10k  [0603]  11.05,13.84 90 top
R5  2.2k  [0603]  49.28,25.91 90 top
R6  2.2k  [0603]  41.66,25.91 90 top
R7  1k  [0603]  52.2,13.84 270 top
R8  10k  [0603]  36.96,13.84 90 top
R9  2.2k  [0603]  75.18,25.91 90 top
R10  2.2k  [0603]  67.56,25.91 90 top
R11  1k  [0603]  78.11,13.84 270 top
R12  10k  [0603]  62.86,13.84 90 top
R13  2.2k  [0603]  101.09,25.91 90 top
R14  2.2k  [0603]  93.47,25.91 90 top
R15  1k  [0603]  104.01,13.84 270 top
R16  10k  [0603]  88.77,13.84 90 top
R17  2.2k  [0603]  127,25.91 90 top
R18  2.2k  [0603]  119.38,25.91 90 top
R19  1k  [0603]  129.92,13.84 270 top
R20  10k  [0603]  114.68,13.84 90 top
R21  2.2k  [0603]  23.37,51.82 90 top
R22  2.2k  [0603]  15.75,51.82 90 top
R23  1k  [0603]  26.29,39.75 270 top
R24  10k  [0603]  11.05,39.75 90 top
R25  2.2k  [0603]  49.28,51.82 90 top
R26  2.2k  [0603]  41.66,51.82 90 top
R27  1k  [0603]  52.2,39.75 270 top
R28  10k  [0603]  36.96,39.75 90 top
R29  2.2k  [0603]  75.18,51.82 90 top
R30  2.2k  [0603]  67.56,51.82 90 top
R31  1k  [0603]  78.11,39.75 270 top
R32  10k  [0603]  62.86,39.75 90 top
R33  2.2k  [0603]  101.09,51.82 90 top
R34  2.2k  [0603]  93.47,51.82 90 top
R35  1k  [0603]  104.01,39.75 270 top
R36  10k  [0603]  88.77,39.75 90 top
R37  2.2k  [0603]  127,51.82 90 top
R38  2.2k  [0603]  119.38,51.82 90 top
R39  1k  [0603]  129.92,39.75 270 top
R40  10k  [0603]  114.68,39.75 90 top
R41  2.2k  [0603]  23.37,77.72 90 top
R42  2.2k  [0603]  15.75,77.72 90 top
R43  1k  [0603]  26.29,65.66 270 top
R44  10k  [0603]  11.05,65.66 90 top
R45  2.2k  [0603]  49.28,77.72 90 top
R46  2.2k  [0603]  41.66,77.72 90 top
R47  1k  [0603]  52.2,65.66 270 top
R48  10k  [0603]  36.96,65.66 90 top
R49  2.2k  [0603]  75.18,77.72 90 top
R50  2.2k  [0603]  67.56,77.72 90 top
R51  1k  [0603]  78.11,65.66 270 top
R52  10k  [0603]  62.86,65.66 90 top
R53  2.2k  [0603]  101.09,77.72 90 top
R54  2.2k  [0603]  93.47,77.72 90 top
R55  1k  [0603]  104.01,65.66 270 top
R56  10k  [0603]  88.77,65.66 90 top
R57  2.2k  [0603]  127,77.72 90 top
R58  2.2k  [0603]  119.38,77.72 90 top
R59  1k  [0603]  129.92,65.66 270 top
R60  10k  [0603]  114.68,65.66 90 top
R61  2.2k  [0603]  23.37,103.63 90 top
R62  2.2k  [0603]  15.75,103.63 90 top
R63  1k  [0603]  26.29,91.57 270 top
R64  10k  [0603]  11.05,91.57 90 top
R65  2.2k  [0603]  49.28,103.63 90 top
R66  2.2k  [0603]  41.66,103.63 90 top
R67  1k  [0603]  52.2,91.57 270 top
R68  10k  [0603]  36.96,91.57 90 top
R69  2.2k  [0603]  75.18,103.63 90 top
R70  2.2k  [0603]  67.56,103.63 90 top
R71  1k  [0603]  78.11,91.57 270 top
R72  10k  [0603]  62.86,91.57 90 top
R73  2.2k  [0603]  101.09,103.63 90 top
R74  2.2k  [0603]  93.47,103.63 90 top
R75  1k  [0603]  104.01,91.57 270 top
R76  10k  [0603]  88.77,91.57 90 top
R77  2.2k  [0603]  127,103.63 90 top
R78  2.2k  [0603]  119.38,103.63 90 top
R79  1k  [0603]  129.92,91.57 270 top
R80  10k  [0603]  114.68,91.57 90 top
R81  2.2k  [0603]  23.37,129.54 90 top
R82  2.2k  [0603]  15.75,129.54 90 top
R83  1k  [0603]  26.29,117.48 270 top
R84  10k  [0603]  11.05,117.48 90 top
R85  2.2k  [0603]  49.28,129.54 90 top
R86  2.2k  [0603]  41.66,129.54 90 top
R87  1k  [0603]  52.2,117.48 270 top
R88  10k  [0603]  36.96,117.48 90 top
R89  2.2k  [0603]  75.18,129.54 90 top
R90  2.2k  [0603]  67.56,129.54 90 top
R91  1k  [0603]  78.11,117.48 270 top
R92  10k  [0603]  62.86,117.48 90 top
R93  2.2k  [0603]  101.09,129.54 90 top
R94  2.2k  [0603]  93.47,129.54 90 top
R95  1k  [0603]  104.01,117.48 270 top
R96  10k  [0603]  88.77,117.48 90 top
R97  2.2k  [0603]  127,129.54 90 top
R98  2.2k  [0603]  119.38,129.54 90 top
R99  1k  [0603]  129.92,117.48 270 top
R100  10k  [0603]  114.68,117.48 90 top
U1  BMP388BMP388  [LGA-10(2X2)]  19.56,19.56 0 top
U2  BMP388BMP388  [LGA-10(2X2)]  45.47,19.56 0 top
U3  BMP388BMP388  [LGA-10(2X2)]  71.37,19.56 0 top
U4  BMP388BMP388  [LGA-10(2X2)]  97.28,19.56 0 top
U5  BMP388BMP388  [LGA-10(2X2)]  123.19,19.56 0 top
U6  BMP388BMP388  [LGA-10(2X2)]  19.56,45.47 0 top
U7  BMP388BMP388  [LGA-10(2X2)]  45.47,45.47 0 top
U8  BMP388BMP388  [LGA-10(2X2)]  71.37,45.47 0 top
U9  BMP388BMP388  [LGA-10(2X2)]  97.28,45.47 0 top
U10  BMP388BMP388  [LGA-10(2X2)]  123.19,45.47 0 top
U11  BMP388BMP388  [LGA-10(2X2)]  19.56,71.37 0 top
U12  BMP388BMP388  [LGA-10(2X2)]  45.47,71.37 0 top
U13  BMP388BMP388  [LGA-10(2X2)]  71.37,71.37 0 top
U14  BMP388BMP388  [LGA-10(2X2)]  97.28,71.37 0 top
U15  BMP388BMP388  [LGA-10(2X2)]  123.19,71.37 0 top
U16  BMP388BMP388  [LGA-10(2X2)]  19.56,97.28 0 top
U17  BMP388BMP388  [LGA-10(2X2)]  45.47,97.28 0 top
U18  BMP388BMP388  [LGA-10(2X2)]  71.37,97.28 0 top
U19  BMP388BMP388  [LGA-10(2X2)]  97.28,97.28 0 top
U20  BMP388BMP388  [LGA-10(2X2)]  123.19,97.28 0 top
U21  BMP388BMP388  [LGA-10(2X2)]  19.56,123.19 0 top
U22  BMP388BMP388  [LGA-10(2X2)]  45.47,123.19 0 top
U23  BMP388BMP388  [LGA-10(2X2)]  71.37,123.19 0 top
U24  BMP388BMP388  [LGA-10(2X2)]  97.28,123.19 0 top
U25  BMP388BMP388  [LGA-10(2X2)]  123.19,123.19 0 top
U$1  [#_GND#3889]  14.48,8.51 90 top
U$2  [#_3V3#3890]  17.02,8.51 90 top
U$3  [#_SDA#3891]  19.56,8.51 90 top
U$4  [#_SCL#3892]  22.1,8.51 90 top
U$5  [#_#INT##3893]  24.64,8.51 90 top
U$6  [#I�C#1]  18.16,24.26 0 top
U$7  [#ADR#2]  18.67,13.97 0 bottom
U$8  [#LED#0]  23.75,13.97 0 bottom
U$9  [#_#INT##3893]  24.64,8.51 90 bottom
U$10  [#_SCL#3892]  22.1,8.51 90 bottom
U$11  [#_SDA#3891]  19.56,8.51 90 bottom
U$12  [#_3V3#3890]  17.02,8.51 90 bottom
U$13  [#_GND#3889]  14.48,8.51 90 bottom
U$14  [QWIIC_BMP3888]  12.32,30.61 0 top
U$15  [PRESSURE_SENSOR9]  11.3,28.96 0 top
U$16  [QWIIC_COPYRIGHT_SMALL]  10.03,24.38 0 top
U$17  [QWIIC_BMP3888]  26.67,24.64 0 bottom
U$18  [PRESSURE_SENSOR9]  27.81,22.86 0 bottom
U$19  [SPARKX-SMALL]  19.56,27.18 0 bottom
U$20  [PWR0]  29.08,12.19 90 top
U$21  [#_GND#3889]  40.39,8.51 90 top
U$22  [#_3V3#3890]  42.93,8.51 90 top
U$23  [#_SDA#3891]  45.47,8.51 90 top
U$24  [#_SCL#3892]  48.01,8.51 90 top
U$25  [#_#INT##3893]  50.55,8.51 90 top
U$26  [#I�C#1]  44.07,24.26 0 top
U$27  [#ADR#2]  44.58,13.97 0 bottom
U$28  [#LED#0]  49.66,13.97 0 bottom
U$29  [#_#INT##3893]  50.55,8.51 90 bottom
U$30  [#_SCL#3892]  48.01,8.51 90 bottom
U$31  [#_SDA#3891]  45.47,8.51 90 bottom
U$32  [#_3V3#3890]  42.93,8.51 90 bottom
U$33  [#_GND#3889]  40.39,8.51 90 bottom
U$34  [QWIIC_BMP3888]  38.23,30.61 0 top
U$35  [PRESSURE_SENSOR9]  37.21,28.96 0 top
U$36  [QWIIC_COPYRIGHT_SMALL]  35.94,24.38 0 top
U$37  [QWIIC_BMP3888]  52.58,24.64 0 bottom
U$38  [PRESSURE_SENSOR9]  53.72,22.86 0 bottom
U$39  [SPARKX-SMALL]  45.47,27.18 0 bottom
U$40  [PWR0]  54.99,12.19 90 top
U$41  [#_GND#3889]  66.29,8.51 90 top
U$42  [#_3V3#3890]  68.83,8.51 90 top
U$43  [#_SDA#3891]  71.37,8.51 90 top
U$44  [#_SCL#3892]  73.91,8.51 90 top
U$45  [#_#INT##3893]  76.45,8.51 90 top
U$46  [#I�C#1]  69.98,24.26 0 top
U$47  [#ADR#2]  70.48,13.97 0 bottom
U$48  [#LED#0]  75.56,13.97 0 bottom
U$49  [#_#INT##3893]  76.45,8.51 90 bottom
U$50  [#_SCL#3892]  73.91,8.51 90 bottom
U$51  [#_SDA#3891]  71.37,8.51 90 bottom
U$52  [#_3V3#3890]  68.83,8.51 90 bottom
U$53  [#_GND#3889]  66.29,8.51 90 bottom
U$54  [QWIIC_BMP3888]  64.14,30.61 0 top
U$55  [PRESSURE_SENSOR9]  63.12,28.96 0 top
U$56  [QWIIC_COPYRIGHT_SMALL]  61.85,24.38 0 top
U$57  [QWIIC_BMP3888]  78.49,24.64 0 bottom
U$58  [PRESSURE_SENSOR9]  79.63,22.86 0 bottom
U$59  [SPARKX-SMALL]  71.37,27.18 0 bottom
U$60  [PWR0]  80.9,12.19 90 top
U$61  [#_GND#3889]  92.2,8.51 90 top
U$62  [#_3V3#3890]  94.74,8.51 90 top
U$63  [#_SDA#3891]  97.28,8.51 90 top
U$64  [#_SCL#3892]  99.82,8.51 90 top
U$65  [#_#INT##3893]  102.36,8.51 90 top
U$66  [#I�C#1]  95.89,24.26 0 top
U$67  [#ADR#2]  96.39,13.97 0 bottom
U$68  [#LED#0]  101.47,13.97 0 bottom
U$69  [#_#INT##3893]  102.36,8.51 90 bottom
U$70  [#_SCL#3892]  99.82,8.51 90 bottom
U$71  [#_SDA#3891]  97.28,8.51 90 bottom
U$72  [#_3V3#3890]  94.74,8.51 90 bottom
U$73  [#_GND#3889]  92.2,8.51 90 bottom
U$74  [QWIIC_BMP3888]  90.04,30.61 0 top
U$75  [PRESSURE_SENSOR9]  89.03,28.96 0 top
U$76  [QWIIC_COPYRIGHT_SMALL]  87.76,24.38 0 top
U$77  [QWIIC_BMP3888]  104.39,24.64 0 bottom
U$78  [PRESSURE_SENSOR9]  105.54,22.86 0 bottom
U$79  [SPARKX-SMALL]  97.28,27.18 0 bottom
U$80  [PWR0]  106.81,12.19 90 top
U$81  [#_GND#3889]  118.11,8.51 90 top
U$82  [#_3V3#3890]  120.65,8.51 90 top
U$83  [#_SDA#3891]  123.19,8.51 90 top
U$84  [#_SCL#3892]  125.73,8.51 90 top
U$85  [#_#INT##3893]  128.27,8.51 90 top
U$86  [#I�C#1]  121.79,24.26 0 top
U$87  [#ADR#2]  122.3,13.97 0 bottom
U$88  [#LED#0]  127.38,13.97 0 bottom
U$89  [#_#INT##3893]  128.27,8.51 90 bottom
U$90  [#_SCL#3892]  125.73,8.51 90 bottom
U$91  [#_SDA#3891]  123.19,8.51 90 bottom
U$92  [#_3V3#3890]  120.65,8.51 90 bottom
U$93  [#_GND#3889]  118.11,8.51 90 bottom
U$94  [QWIIC_BMP3888]  115.95,30.61 0 top
U$95  [PRESSURE_SENSOR9]  114.94,28.96 0 top
U$96  [QWIIC_COPYRIGHT_SMALL]  113.67,24.38 0 top
U$97  [QWIIC_BMP3888]  130.3,24.64 0 bottom
U$98  [PRESSURE_SENSOR9]  131.44,22.86 0 bottom
U$99  [SPARKX-SMALL]  123.19,27.18 0 bottom
U$100  [PWR0]  132.72,12.19 90 top
U$101  [#_GND#3889]  14.48,34.42 90 top
U$102  [#_3V3#3890]  17.02,34.42 90 top
U$103  [#_SDA#3891]  19.56,34.42 90 top
U$104  [#_SCL#3892]  22.1,34.42 90 top
U$105  [#_#INT##3893]  24.64,34.42 90 top
U$106  [#I�C#1]  18.16,50.16 0 top
U$107  [#ADR#2]  18.67,39.88 0 bottom
U$108  [#LED#0]  23.75,39.88 0 bottom
U$109  [#_#INT##3893]  24.64,34.42 90 bottom
U$110  [#_SCL#3892]  22.1,34.42 90 bottom
U$111  [#_SDA#3891]  19.56,34.42 90 bottom
U$112  [#_3V3#3890]  17.02,34.42 90 bottom
U$113  [#_GND#3889]  14.48,34.42 90 bottom
U$114  [QWIIC_BMP3888]  12.32,56.51 0 top
U$115  [PRESSURE_SENSOR9]  11.3,54.86 0 top
U$116  [QWIIC_COPYRIGHT_SMALL]  10.03,50.29 0 top
U$117  [QWIIC_BMP3888]  26.67,50.55 0 bottom
U$118  [PRESSURE_SENSOR9]  27.81,48.77 0 bottom
U$119  [SPARKX-SMALL]  19.56,53.09 0 bottom
U$120  [PWR0]  29.08,38.1 90 top
U$121  [#_GND#3889]  40.39,34.42 90 top
U$122  [#_3V3#3890]  42.93,34.42 90 top
U$123  [#_SDA#3891]  45.47,34.42 90 top
U$124  [#_SCL#3892]  48.01,34.42 90 top
U$125  [#_#INT##3893]  50.55,34.42 90 top
U$126  [#I�C#1]  44.07,50.16 0 top
U$127  [#ADR#2]  44.58,39.88 0 bottom
U$128  [#LED#0]  49.66,39.88 0 bottom
U$129  [#_#INT##3893]  50.55,34.42 90 bottom
U$130  [#_SCL#3892]  48.01,34.42 90 bottom
U$131  [#_SDA#3891]  45.47,34.42 90 bottom
U$132  [#_3V3#3890]  42.93,34.42 90 bottom
U$133  [#_GND#3889]  40.39,34.42 90 bottom
U$134  [QWIIC_BMP3888]  38.23,56.51 0 top
U$135  [PRESSURE_SENSOR9]  37.21,54.86 0 top
U$136  [QWIIC_COPYRIGHT_SMALL]  35.94,50.29 0 top
U$137  [QWIIC_BMP3888]  52.58,50.55 0 bottom
U$138  [PRESSURE_SENSOR9]  53.72,48.77 0 bottom
U$139  [SPARKX-SMALL]  45.47,53.09 0 bottom
U$140  [PWR0]  54.99,38.1 90 top
U$141  [#_GND#3889]  66.29,34.42 90 top
U$142  [#_3V3#3890]  68.83,34.42 90 top
U$143  [#_SDA#3891]  71.37,34.42 90 top
U$144  [#_SCL#3892]  73.91,34.42 90 top
U$145  [#_#INT##3893]  76.45,34.42 90 top
U$146  [#I�C#1]  69.98,50.16 0 top
U$147  [#ADR#2]  70.48,39.88 0 bottom
U$148  [#LED#0]  75.56,39.88 0 bottom
U$149  [#_#INT##3893]  76.45,34.42 90 bottom
U$150  [#_SCL#3892]  73.91,34.42 90 bottom
U$151  [#_SDA#3891]  71.37,34.42 90 bottom
U$152  [#_3V3#3890]  68.83,34.42 90 bottom
U$153  [#_GND#3889]  66.29,34.42 90 bottom
U$154  [QWIIC_BMP3888]  64.14,56.51 0 top
U$155  [PRESSURE_SENSOR9]  63.12,54.86 0 top
U$156  [QWIIC_COPYRIGHT_SMALL]  61.85,50.29 0 top
U$157  [QWIIC_BMP3888]  78.49,50.55 0 bottom
U$158  [PRESSURE_SENSOR9]  79.63,48.77 0 bottom
U$159  [SPARKX-SMALL]  71.37,53.09 0 bottom
U$160  [PWR0]  80.9,38.1 90 top
U$161  [#_GND#3889]  92.2,34.42 90 top
U$162  [#_3V3#3890]  94.74,34.42 90 top
U$163  [#_SDA#3891]  97.28,34.42 90 top
U$164  [#_SCL#3892]  99.82,34.42 90 top
U$165  [#_#INT##3893]  102.36,34.42 90 top
U$166  [#I�C#1]  95.89,50.16 0 top
U$167  [#ADR#2]  96.39,39.88 0 bottom
U$168  [#LED#0]  101.47,39.88 0 bottom
U$169  [#_#INT##3893]  102.36,34.42 90 bottom
U$170  [#_SCL#3892]  99.82,34.42 90 bottom
U$171  [#_SDA#3891]  97.28,34.42 90 bottom
U$172  [#_3V3#3890]  94.74,34.42 90 bottom
U$173  [#_GND#3889]  92.2,34.42 90 bottom
U$174  [QWIIC_BMP3888]  90.04,56.51 0 top
U$175  [PRESSURE_SENSOR9]  89.03,54.86 0 top
U$176  [QWIIC_COPYRIGHT_SMALL]  87.76,50.29 0 top
U$177  [QWIIC_BMP3888]  104.39,50.55 0 bottom
U$178  [PRESSURE_SENSOR9]  105.54,48.77 0 bottom
U$179  [SPARKX-SMALL]  97.28,53.09 0 bottom
U$180  [PWR0]  106.81,38.1 90 top
U$181  [#_GND#3889]  118.11,34.42 90 top
U$182  [#_3V3#3890]  120.65,34.42 90 top
U$183  [#_SDA#3891]  123.19,34.42 90 top
U$184  [#_SCL#3892]  125.73,34.42 90 top
U$185  [#_#INT##3893]  128.27,34.42 90 top
U$186  [#I�C#1]  121.79,50.16 0 top
U$187  [#ADR#2]  122.3,39.88 0 bottom
U$188  [#LED#0]  127.38,39.88 0 bottom
U$189  [#_#INT##3893]  128.27,34.42 90 bottom
U$190  [#_SCL#3892]  125.73,34.42 90 bottom
U$191  [#_SDA#3891]  123.19,34.42 90 bottom
U$192  [#_3V3#3890]  120.65,34.42 90 bottom
U$193  [#_GND#3889]  118.11,34.42 90 bottom
U$194  [QWIIC_BMP3888]  115.95,56.51 0 top
U$195  [PRESSURE_SENSOR9]  114.94,54.86 0 top
U$196  [QWIIC_COPYRIGHT_SMALL]  113.67,50.29 0 top
U$197  [QWIIC_BMP3888]  130.3,50.55 0 bottom
U$198  [PRESSURE_SENSOR9]  131.44,48.77 0 bottom
U$199  [SPARKX-SMALL]  123.19,53.09 0 bottom
U$200  [PWR0]  132.72,38.1 90 top
U$201  [#_GND#3889]  14.48,60.32 90 top
U$202  [#_3V3#3890]  17.02,60.32 90 top
U$203  [#_SDA#3891]  19.56,60.32 90 top
U$204  [#_SCL#3892]  22.1,60.32 90 top
U$205  [#_#INT##3893]  24.64,60.32 90 top
U$206  [#I�C#1]  18.16,76.07 0 top
U$207  [#ADR#2]  18.67,65.79 0 bottom
U$208  [#LED#0]  23.75,65.79 0 bottom
U$209  [#_#INT##3893]  24.64,60.32 90 bottom
U$210  [#_SCL#3892]  22.1,60.32 90 bottom
U$211  [#_SDA#3891]  19.56,60.32 90 bottom
U$212  [#_3V3#3890]  17.02,60.32 90 bottom
U$213  [#_GND#3889]  14.48,60.32 90 bottom
U$214  [QWIIC_BMP3888]  12.32,82.42 0 top
U$215  [PRESSURE_SENSOR9]  11.3,80.77 0 top
U$216  [QWIIC_COPYRIGHT_SMALL]  10.03,76.2 0 top
U$217  [QWIIC_BMP3888]  26.67,76.45 0 bottom
U$218  [PRESSURE_SENSOR9]  27.81,74.68 0 bottom
U$219  [SPARKX-SMALL]  19.56,78.99 0 bottom
U$220  [PWR0]  29.08,64.01 90 top
U$221  [#_GND#3889]  40.39,60.32 90 top
U$222  [#_3V3#3890]  42.93,60.32 90 top
U$223  [#_SDA#3891]  45.47,60.32 90 top
U$224  [#_SCL#3892]  48.01,60.32 90 top
U$225  [#_#INT##3893]  50.55,60.32 90 top
U$226  [#I�C#1]  44.07,76.07 0 top
U$227  [#ADR#2]  44.58,65.79 0 bottom
U$228  [#LED#0]  49.66,65.79 0 bottom
U$229  [#_#INT##3893]  50.55,60.32 90 bottom
U$230  [#_SCL#3892]  48.01,60.32 90 bottom
U$231  [#_SDA#3891]  45.47,60.32 90 bottom
U$232  [#_3V3#3890]  42.93,60.32 90 bottom
U$233  [#_GND#3889]  40.39,60.32 90 bottom
U$234  [QWIIC_BMP3888]  38.23,82.42 0 top
U$235  [PRESSURE_SENSOR9]  37.21,80.77 0 top
U$236  [QWIIC_COPYRIGHT_SMALL]  35.94,76.2 0 top
U$237  [QWIIC_BMP3888]  52.58,76.45 0 bottom
U$238  [PRESSURE_SENSOR9]  53.72,74.68 0 bottom
U$239  [SPARKX-SMALL]  45.47,78.99 0 bottom
U$240  [PWR0]  54.99,64.01 90 top
U$241  [#_GND#3889]  66.29,60.32 90 top
U$242  [#_3V3#3890]  68.83,60.32 90 top
U$243  [#_SDA#3891]  71.37,60.32 90 top
U$244  [#_SCL#3892]  73.91,60.32 90 top
U$245  [#_#INT##3893]  76.45,60.32 90 top
U$246  [#I�C#1]  69.98,76.07 0 top
U$247  [#ADR#2]  70.48,65.79 0 bottom
U$248  [#LED#0]  75.56,65.79 0 bottom
U$249  [#_#INT##3893]  76.45,60.32 90 bottom
U$250  [#_SCL#3892]  73.91,60.32 90 bottom
U$251  [#_SDA#3891]  71.37,60.32 90 bottom
U$252  [#_3V3#3890]  68.83,60.32 90 bottom
U$253  [#_GND#3889]  66.29,60.32 90 bottom
U$254  [QWIIC_BMP3888]  64.14,82.42 0 top
U$255  [PRESSURE_SENSOR9]  63.12,80.77 0 top
U$256  [QWIIC_COPYRIGHT_SMALL]  61.85,76.2 0 top
U$257  [QWIIC_BMP3888]  78.49,76.45 0 bottom
U$258  [PRESSURE_SENSOR9]  79.63,74.68 0 bottom
U$259  [SPARKX-SMALL]  71.37,78.99 0 bottom
U$260  [PWR0]  80.9,64.01 90 top
U$261  [#_GND#3889]  92.2,60.32 90 top
U$262  [#_3V3#3890]  94.74,60.32 90 top
U$263  [#_SDA#3891]  97.28,60.32 90 top
U$264  [#_SCL#3892]  99.82,60.32 90 top
U$265  [#_#INT##3893]  102.36,60.32 90 top
U$266  [#I�C#1]  95.89,76.07 0 top
U$267  [#ADR#2]  96.39,65.79 0 bottom
U$268  [#LED#0]  101.47,65.79 0 bottom
U$269  [#_#INT##3893]  102.36,60.32 90 bottom
U$270  [#_SCL#3892]  99.82,60.32 90 bottom
U$271  [#_SDA#3891]  97.28,60.32 90 bottom
U$272  [#_3V3#3890]  94.74,60.32 90 bottom
U$273  [#_GND#3889]  92.2,60.32 90 bottom
U$274  [QWIIC_BMP3888]  90.04,82.42 0 top
U$275  [PRESSURE_SENSOR9]  89.03,80.77 0 top
U$276  [QWIIC_COPYRIGHT_SMALL]  87.76,76.2 0 top
U$277  [QWIIC_BMP3888]  104.39,76.45 0 bottom
U$278  [PRESSURE_SENSOR9]  105.54,74.68 0 bottom
U$279  [SPARKX-SMALL]  97.28,78.99 0 bottom
U$280  [PWR0]  106.81,64.01 90 top
U$281  [#_GND#3889]  118.11,60.32 90 top
U$282  [#_3V3#3890]  120.65,60.32 90 top
U$283  [#_SDA#3891]  123.19,60.32 90 top
U$284  [#_SCL#3892]  125.73,60.32 90 top
U$285  [#_#INT##3893]  128.27,60.32 90 top
U$286  [#I�C#1]  121.79,76.07 0 top
U$287  [#ADR#2]  122.3,65.79 0 bottom
U$288  [#LED#0]  127.38,65.79 0 bottom
U$289  [#_#INT##3893]  128.27,60.32 90 bottom
U$290  [#_SCL#3892]  125.73,60.32 90 bottom
U$291  [#_SDA#3891]  123.19,60.32 90 bottom
U$292  [#_3V3#3890]  120.65,60.32 90 bottom
U$293  [#_GND#3889]  118.11,60.32 90 bottom
U$294  [QWIIC_BMP3888]  115.95,82.42 0 top
U$295  [PRESSURE_SENSOR9]  114.94,80.77 0 top
U$296  [QWIIC_COPYRIGHT_SMALL]  113.67,76.2 0 top
U$297  [QWIIC_BMP3888]  130.3,76.45 0 bottom
U$298  [PRESSURE_SENSOR9]  131.44,74.68 0 bottom
U$299  [SPARKX-SMALL]  123.19,78.99 0 bottom
U$300  [PWR0]  132.72,64.01 90 top
U$301  [#_GND#3889]  14.48,86.23 90 top
U$302  [#_3V3#3890]  17.02,86.23 90 top
U$303  [#_SDA#3891]  19.56,86.23 90 top
U$304  [#_SCL#3892]  22.1,86.23 90 top
U$305  [#_#INT##3893]  24.64,86.23 90 top
U$306  [#I�C#1]  18.16,101.98 0 top
U$307  [#ADR#2]  18.67,91.69 0 bottom
U$308  [#LED#0]  23.75,91.69 0 bottom
U$309  [#_#INT##3893]  24.64,86.23 90 bottom
U$310  [#_SCL#3892]  22.1,86.23 90 bottom
U$311  [#_SDA#3891]  19.56,86.23 90 bottom
U$312  [#_3V3#3890]  17.02,86.23 90 bottom
U$313  [#_GND#3889]  14.48,86.23 90 bottom
U$314  [QWIIC_BMP3888]  12.32,108.33 0 top
U$315  [PRESSURE_SENSOR9]  11.3,106.68 0 top
U$316  [QWIIC_COPYRIGHT_SMALL]  10.03,102.11 0 top
U$317  [QWIIC_BMP3888]  26.67,102.36 0 bottom
U$318  [PRESSURE_SENSOR9]  27.81,100.58 0 bottom
U$319  [SPARKX-SMALL]  19.56,104.9 0 bottom
U$320  [PWR0]  29.08,89.92 90 top
U$321  [#_GND#3889]  40.39,86.23 90 top
U$322  [#_3V3#3890]  42.93,86.23 90 top
U$323  [#_SDA#3891]  45.47,86.23 90 top
U$324  [#_SCL#3892]  48.01,86.23 90 top
U$325  [#_#INT##3893]  50.55,86.23 90 top
U$326  [#I�C#1]  44.07,101.98 0 top
U$327  [#ADR#2]  44.58,91.69 0 bottom
U$328  [#LED#0]  49.66,91.69 0 bottom
U$329  [#_#INT##3893]  50.55,86.23 90 bottom
U$330  [#_SCL#3892]  48.01,86.23 90 bottom
U$331  [#_SDA#3891]  45.47,86.23 90 bottom
U$332  [#_3V3#3890]  42.93,86.23 90 bottom
U$333  [#_GND#3889]  40.39,86.23 90 bottom
U$334  [QWIIC_BMP3888]  38.23,108.33 0 top
U$335  [PRESSURE_SENSOR9]  37.21,106.68 0 top
U$336  [QWIIC_COPYRIGHT_SMALL]  35.94,102.11 0 top
U$337  [QWIIC_BMP3888]  52.58,102.36 0 bottom
U$338  [PRESSURE_SENSOR9]  53.72,100.58 0 bottom
U$339  [SPARKX-SMALL]  45.47,104.9 0 bottom
U$340  [PWR0]  54.99,89.92 90 top
U$341  [#_GND#3889]  66.29,86.23 90 top
U$342  [#_3V3#3890]  68.83,86.23 90 top
U$343  [#_SDA#3891]  71.37,86.23 90 top
U$344  [#_SCL#3892]  73.91,86.23 90 top
U$345  [#_#INT##3893]  76.45,86.23 90 top
U$346  [#I�C#1]  69.98,101.98 0 top
U$347  [#ADR#2]  70.48,91.69 0 bottom
U$348  [#LED#0]  75.56,91.69 0 bottom
U$349  [#_#INT##3893]  76.45,86.23 90 bottom
U$350  [#_SCL#3892]  73.91,86.23 90 bottom
U$351  [#_SDA#3891]  71.37,86.23 90 bottom
U$352  [#_3V3#3890]  68.83,86.23 90 bottom
U$353  [#_GND#3889]  66.29,86.23 90 bottom
U$354  [QWIIC_BMP3888]  64.14,108.33 0 top
U$355  [PRESSURE_SENSOR9]  63.12,106.68 0 top
U$356  [QWIIC_COPYRIGHT_SMALL]  61.85,102.11 0 top
U$357  [QWIIC_BMP3888]  78.49,102.36 0 bottom
U$358  [PRESSURE_SENSOR9]  79.63,100.58 0 bottom
U$359  [SPARKX-SMALL]  71.37,104.9 0 bottom
U$360  [PWR0]  80.9,89.92 90 top
U$361  [#_GND#3889]  92.2,86.23 90 top
U$362  [#_3V3#3890]  94.74,86.23 90 top
U$363  [#_SDA#3891]  97.28,86.23 90 top
U$364  [#_SCL#3892]  99.82,86.23 90 top
U$365  [#_#INT##3893]  102.36,86.23 90 top
U$366  [#I�C#1]  95.89,101.98 0 top
U$367  [#ADR#2]  96.39,91.69 0 bottom
U$368  [#LED#0]  101.47,91.69 0 bottom
U$369  [#_#INT##3893]  102.36,86.23 90 bottom
U$370  [#_SCL#3892]  99.82,86.23 90 bottom
U$371  [#_SDA#3891]  97.28,86.23 90 bottom
U$372  [#_3V3#3890]  94.74,86.23 90 bottom
U$373  [#_GND#3889]  92.2,86.23 90 bottom
U$374  [QWIIC_BMP3888]  90.04,108.33 0 top
U$375  [PRESSURE_SENSOR9]  89.03,106.68 0 top
U$376  [QWIIC_COPYRIGHT_SMALL]  87.76,102.11 0 top
U$377  [QWIIC_BMP3888]  104.39,102.36 0 bottom
U$378  [PRESSURE_SENSOR9]  105.54,100.58 0 bottom
U$379  [SPARKX-SMALL]  97.28,104.9 0 bottom
U$380  [PWR0]  106.81,89.92 90 top
U$381  [#_GND#3889]  118.11,86.23 90 top
U$382  [#_3V3#3890]  120.65,86.23 90 top
U$383  [#_SDA#3891]  123.19,86.23 90 top
U$384  [#_SCL#3892]  125.73,86.23 90 top
U$385  [#_#INT##3893]  128.27,86.23 90 top
U$386  [#I�C#1]  121.79,101.98 0 top
U$387  [#ADR#2]  122.3,91.69 0 bottom
U$388  [#LED#0]  127.38,91.69 0 bottom
U$389  [#_#INT##3893]  128.27,86.23 90 bottom
U$390  [#_SCL#3892]  125.73,86.23 90 bottom
U$391  [#_SDA#3891]  123.19,86.23 90 bottom
U$392  [#_3V3#3890]  120.65,86.23 90 bottom
U$393  [#_GND#3889]  118.11,86.23 90 bottom
U$394  [QWIIC_BMP3888]  115.95,108.33 0 top
U$395  [PRESSURE_SENSOR9]  114.94,106.68 0 top
U$396  [QWIIC_COPYRIGHT_SMALL]  113.67,102.11 0 top
U$397  [QWIIC_BMP3888]  130.3,102.36 0 bottom
U$398  [PRESSURE_SENSOR9]  131.44,100.58 0 bottom
U$399  [SPARKX-SMALL]  123.19,104.9 0 bottom
U$400  [PWR0]  132.72,89.92 90 top
U$401  [#_GND#3889]  14.48,112.14 90 top
U$402  [#_3V3#3890]  17.02,112.14 90 top
U$403  [#_SDA#3891]  19.56,112.14 90 top
U$404  [#_SCL#3892]  22.1,112.14 90 top
U$405  [#_#INT##3893]  24.64,112.14 90 top
U$406  [#I�C#1]  18.16,127.89 0 top
U$407  [#ADR#2]  18.67,117.6 0 bottom
U$408  [#LED#0]  23.75,117.6 0 bottom
U$409  [#_#INT##3893]  24.64,112.14 90 bottom
U$410  [#_SCL#3892]  22.1,112.14 90 bottom
U$411  [#_SDA#3891]  19.56,112.14 90 bottom
U$412  [#_3V3#3890]  17.02,112.14 90 bottom
U$413  [#_GND#3889]  14.48,112.14 90 bottom
U$414  [QWIIC_BMP3888]  12.32,134.24 0 top
U$415  [PRESSURE_SENSOR9]  11.3,132.59 0 top
U$416  [QWIIC_COPYRIGHT_SMALL]  10.03,128.02 0 top
U$417  [QWIIC_BMP3888]  26.67,128.27 0 bottom
U$418  [PRESSURE_SENSOR9]  27.81,126.49 0 bottom
U$419  [SPARKX-SMALL]  19.56,130.81 0 bottom
U$420  [PWR0]  29.08,115.82 90 top
U$421  [#_GND#3889]  40.39,112.14 90 top
U$422  [#_3V3#3890]  42.93,112.14 90 top
U$423  [#_SDA#3891]  45.47,112.14 90 top
U$424  [#_SCL#3892]  48.01,112.14 90 top
U$425  [#_#INT##3893]  50.55,112.14 90 top
U$426  [#I�C#1]  44.07,127.89 0 top
U$427  [#ADR#2]  44.58,117.6 0 bottom
U$428  [#LED#0]  49.66,117.6 0 bottom
U$429  [#_#INT##3893]  50.55,112.14 90 bottom
U$430  [#_SCL#3892]  48.01,112.14 90 bottom
U$431  [#_SDA#3891]  45.47,112.14 90 bottom
U$432  [#_3V3#3890]  42.93,112.14 90 bottom
U$433  [#_GND#3889]  40.39,112.14 90 bottom
U$434  [QWIIC_BMP3888]  38.23,134.24 0 top
U$435  [PRESSURE_SENSOR9]  37.21,132.59 0 top
U$436  [QWIIC_COPYRIGHT_SMALL]  35.94,128.02 0 top
U$437  [QWIIC_BMP3888]  52.58,128.27 0 bottom
U$438  [PRESSURE_SENSOR9]  53.72,126.49 0 bottom
U$439  [SPARKX-SMALL]  45.47,130.81 0 bottom
U$440  [PWR0]  54.99,115.82 90 top
U$441  [#_GND#3889]  66.29,112.14 90 top
U$442  [#_3V3#3890]  68.83,112.14 90 top
U$443  [#_SDA#3891]  71.37,112.14 90 top
U$444  [#_SCL#3892]  73.91,112.14 90 top
U$445  [#_#INT##3893]  76.45,112.14 90 top
U$446  [#I�C#1]  69.98,127.89 0 top
U$447  [#ADR#2]  70.48,117.6 0 bottom
U$448  [#LED#0]  75.56,117.6 0 bottom
U$449  [#_#INT##3893]  76.45,112.14 90 bottom
U$450  [#_SCL#3892]  73.91,112.14 90 bottom
U$451  [#_SDA#3891]  71.37,112.14 90 bottom
U$452  [#_3V3#3890]  68.83,112.14 90 bottom
U$453  [#_GND#3889]  66.29,112.14 90 bottom
U$454  [QWIIC_BMP3888]  64.14,134.24 0 top
U$455  [PRESSURE_SENSOR9]  63.12,132.59 0 top
U$456  [QWIIC_COPYRIGHT_SMALL]  61.85,128.02 0 top
U$457  [QWIIC_BMP3888]  78.49,128.27 0 bottom
U$458  [PRESSURE_SENSOR9]  79.63,126.49 0 bottom
U$459  [SPARKX-SMALL]  71.37,130.81 0 bottom
U$460  [PWR0]  80.9,115.82 90 top
U$461  [#_GND#3889]  92.2,112.14 90 top
U$462  [#_3V3#3890]  94.74,112.14 90 top
U$463  [#_SDA#3891]  97.28,112.14 90 top
U$464  [#_SCL#3892]  99.82,112.14 90 top
U$465  [#_#INT##3893]  102.36,112.14 90 top
U$466  [#I�C#1]  95.89,127.89 0 top
U$467  [#ADR#2]  96.39,117.6 0 bottom
U$468  [#LED#0]  101.47,117.6 0 bottom
U$469  [#_#INT##3893]  102.36,112.14 90 bottom
U$470  [#_SCL#3892]  99.82,112.14 90 bottom
U$471  [#_SDA#3891]  97.28,112.14 90 bottom
U$472  [#_3V3#3890]  94.74,112.14 90 bottom
U$473  [#_GND#3889]  92.2,112.14 90 bottom
U$474  [QWIIC_BMP3888]  90.04,134.24 0 top
U$475  [PRESSURE_SENSOR9]  89.03,132.59 0 top
U$476  [QWIIC_COPYRIGHT_SMALL]  87.76,128.02 0 top
U$477  [QWIIC_BMP3888]  104.39,128.27 0 bottom
U$478  [PRESSURE_SENSOR9]  105.54,126.49 0 bottom
U$479  [SPARKX-SMALL]  97.28,130.81 0 bottom
U$480  [PWR0]  106.81,115.82 90 top
U$481  [#_GND#3889]  118.11,112.14 90 top
U$482  [#_3V3#3890]  120.65,112.14 90 top
U$483  [#_SDA#3891]  123.19,112.14 90 top
U$484  [#_SCL#3892]  125.73,112.14 90 top
U$485  [#_#INT##3893]  128.27,112.14 90 top
U$486  [#I�C#1]  121.79,127.89 0 top
U$487  [#ADR#2]  122.3,117.6 0 bottom
U$488  [#LED#0]  127.38,117.6 0 bottom
U$489  [#_#INT##3893]  128.27,112.14 90 bottom
U$490  [#_SCL#3892]  125.73,112.14 90 bottom
U$491  [#_SDA#3891]  123.19,112.14 90 bottom
U$492  [#_3V3#3890]  120.65,112.14 90 bottom
U$493  [#_GND#3889]  118.11,112.14 90 bottom
U$494  [QWIIC_BMP3888]  115.95,134.24 0 top
U$495  [PRESSURE_SENSOR9]  114.94,132.59 0 top
U$496  [QWIIC_COPYRIGHT_SMALL]  113.67,128.02 0 top
U$497  [QWIIC_BMP3888]  130.3,128.27 0 bottom
U$498  [PRESSURE_SENSOR9]  131.44,126.49 0 bottom
U$499  [SPARKX-SMALL]  123.19,130.81 0 bottom
U$500  [PWR0]  132.72,115.82 90 top

## Library data of the parts
A1-A25 U$19 U$39 U$59 U$79 U$99 U$119 U$139 U$159 U$179 U$199 U$219 U$239 U$259 U$279 U$299 U$319 U$339 U$359 U$379 U$399 U$419 U$439 U$459 U$479 U$499 = SparkX
C1-C50 = SparkFun-Capacitors; PROD_ID: CAP-00810
D1-D25 = SparkFun-LED; PROD_ID: DIO-00819
E$1-E$4 FD1-FD50 = SparkFun-Aesthetics
E$5 = SparkFun-Retired
FRAME1-FRAME25 = SparkFun-Aesthetics; DESIGNER: Nobody; VERSION: v01
J1-J75 = SparkFun-Connectors
JP1-JP75 = SparkFun-Jumpers
R1 R2 R5 R6 R9 R10 R13 R14 R17 R18 R21 R22 R25 R26 R29 R30 R33 R34 R37 R38 R41 R42 R45 R46 R49 R50 R53 R54 R57 R58 R61 R62 R65 R66 R69 R70 R73 R74 R77 R78 R81 R82 R85 R86 R89 R90 R93 R94 R97 R98 = SparkFun-Resistors; PROD_ID: RES-08272
R3 R7 R11 R15 R19 R23 R27 R31 R35 R39 R43 R47 R51 R55 R59 R63 R67 R71 R75 R79 R83 R87 R91 R95 R99 = SparkFun-Resistors; PROD_ID: RES-07856
R4 R8 R12 R16 R20 R24 R28 R32 R36 R40 R44 R48 R52 R56 R60 R64 R68 R72 R76 R80 R84 R88 R92 R96 R100 = SparkFun-Resistors; PROD_ID: RES-00824
U1-U25 = SparkFun-Sensors; PROD_ID: IC-14045
U$1-U$5 U$9-U$13 U$16 U$21-U$25 U$29-U$33 U$36 U$41-U$45 U$49-U$53 U$56 U$61-U$65 U$69-U$73 U$76 U$81-U$85 U$89-U$93 U$96 U$101-U$105 U$109-U$113 U$116 U$121-U$125 U$129-U$133 U$136 U$141-U$145 U$149-U$153 U$156 U$161-U$165 U$169-U$173 U$176 U$181-U$185 U$189-U$193 U$196 U$201-U$205 U$209-U$213 U$216 U$221-U$225 U$229-U$233 U$236 U$241-U$245 U$249-U$253 U$256 U$261-U$265 U$269-U$273 U$276 U$281-U$285 U$289-U$293 U$296 U$301-U$305 U$309-U$313 U$316 U$321-U$325 U$329-U$333 U$336 U$341-U$345 U$349-U$353 U$356 U$361-U$365 U$369-U$373 U$376 U$381-U$385 U$389-U$393 U$396 U$401-U$405 U$409-U$413 U$416 U$421-U$425 U$429-U$433 U$436 U$441-U$445 U$449-U$453 U$456 U$461-U$465 U$469-U$473 U$476 U$481-U$485 U$489-U$493 U$496 = Labels
U$6-U$8 U$26-U$28 U$46-U$48 U$66-U$68 U$86-U$88 U$106-U$108 U$126-U$128 U$146-U$148 U$166-U$168 U$186-U$188 U$206-U$208 U$226-U$228 U$246-U$248 U$266-U$268 U$286-U$288 U$306-U$308 U$326-U$328 U$346-U$348 U$366-U$368 U$386-U$388 U$406-U$408 U$426-U$428 U$446-U$448 U$466-U$468 U$486-U$488 = jumpers
U$14 U$15 U$17 U$18 U$34 U$35 U$37 U$38 U$54 U$55 U$57 U$58 U$74 U$75 U$77 U$78 U$94 U$95 U$97 U$98 U$114 U$115 U$117 U$118 U$134 U$135 U$137 U$138 U$154 U$155 U$157 U$158 U$174 U$175 U$177 U$178 U$194 U$195 U$197 U$198 U$214 U$215 U$217 U$218 U$234 U$235 U$237 U$238 U$254 U$255 U$257 U$258 U$274 U$275 U$277 U$278 U$294 U$295 U$297 U$298 U$314 U$315 U$317 U$318 U$334 U$335 U$337 U$338 U$354 U$355 U$357 U$358 U$374 U$375 U$377 U$378 U$394 U$395 U$397 U$398 U$414 U$415 U$417 U$418 U$434 U$435 U$437 U$438 U$454 U$455 U$457 U$458 U$474 U$475 U$477 U$478 U$494 U$495 U$497 U$498 = output
U$20 U$40 U$60 U$80 U$100 U$120 U$140 U$160 U$180 U$200 U$220 U$240 U$260 U$280 U$300 U$320 U$340 U$360 U$380 U$400 U$420 U$440 U$460 U$480 U$500 = pwr